# Altium PCB TermoCoupleNode.PcbDoc (part 2 of 2)
Units mm, origin at the board's own origin, x right, y up, seen from the top; angles counter-clockwise.
Board outline 65 x 65 mm, 4 copper layers (Top Layer 1, GND, 3V3, Bottom Layer 1), stack 0.408 mm thick; 64 components, 46 nets, 247 pads, 276 vias.
Unrouted connection lines stored in the file: 64.
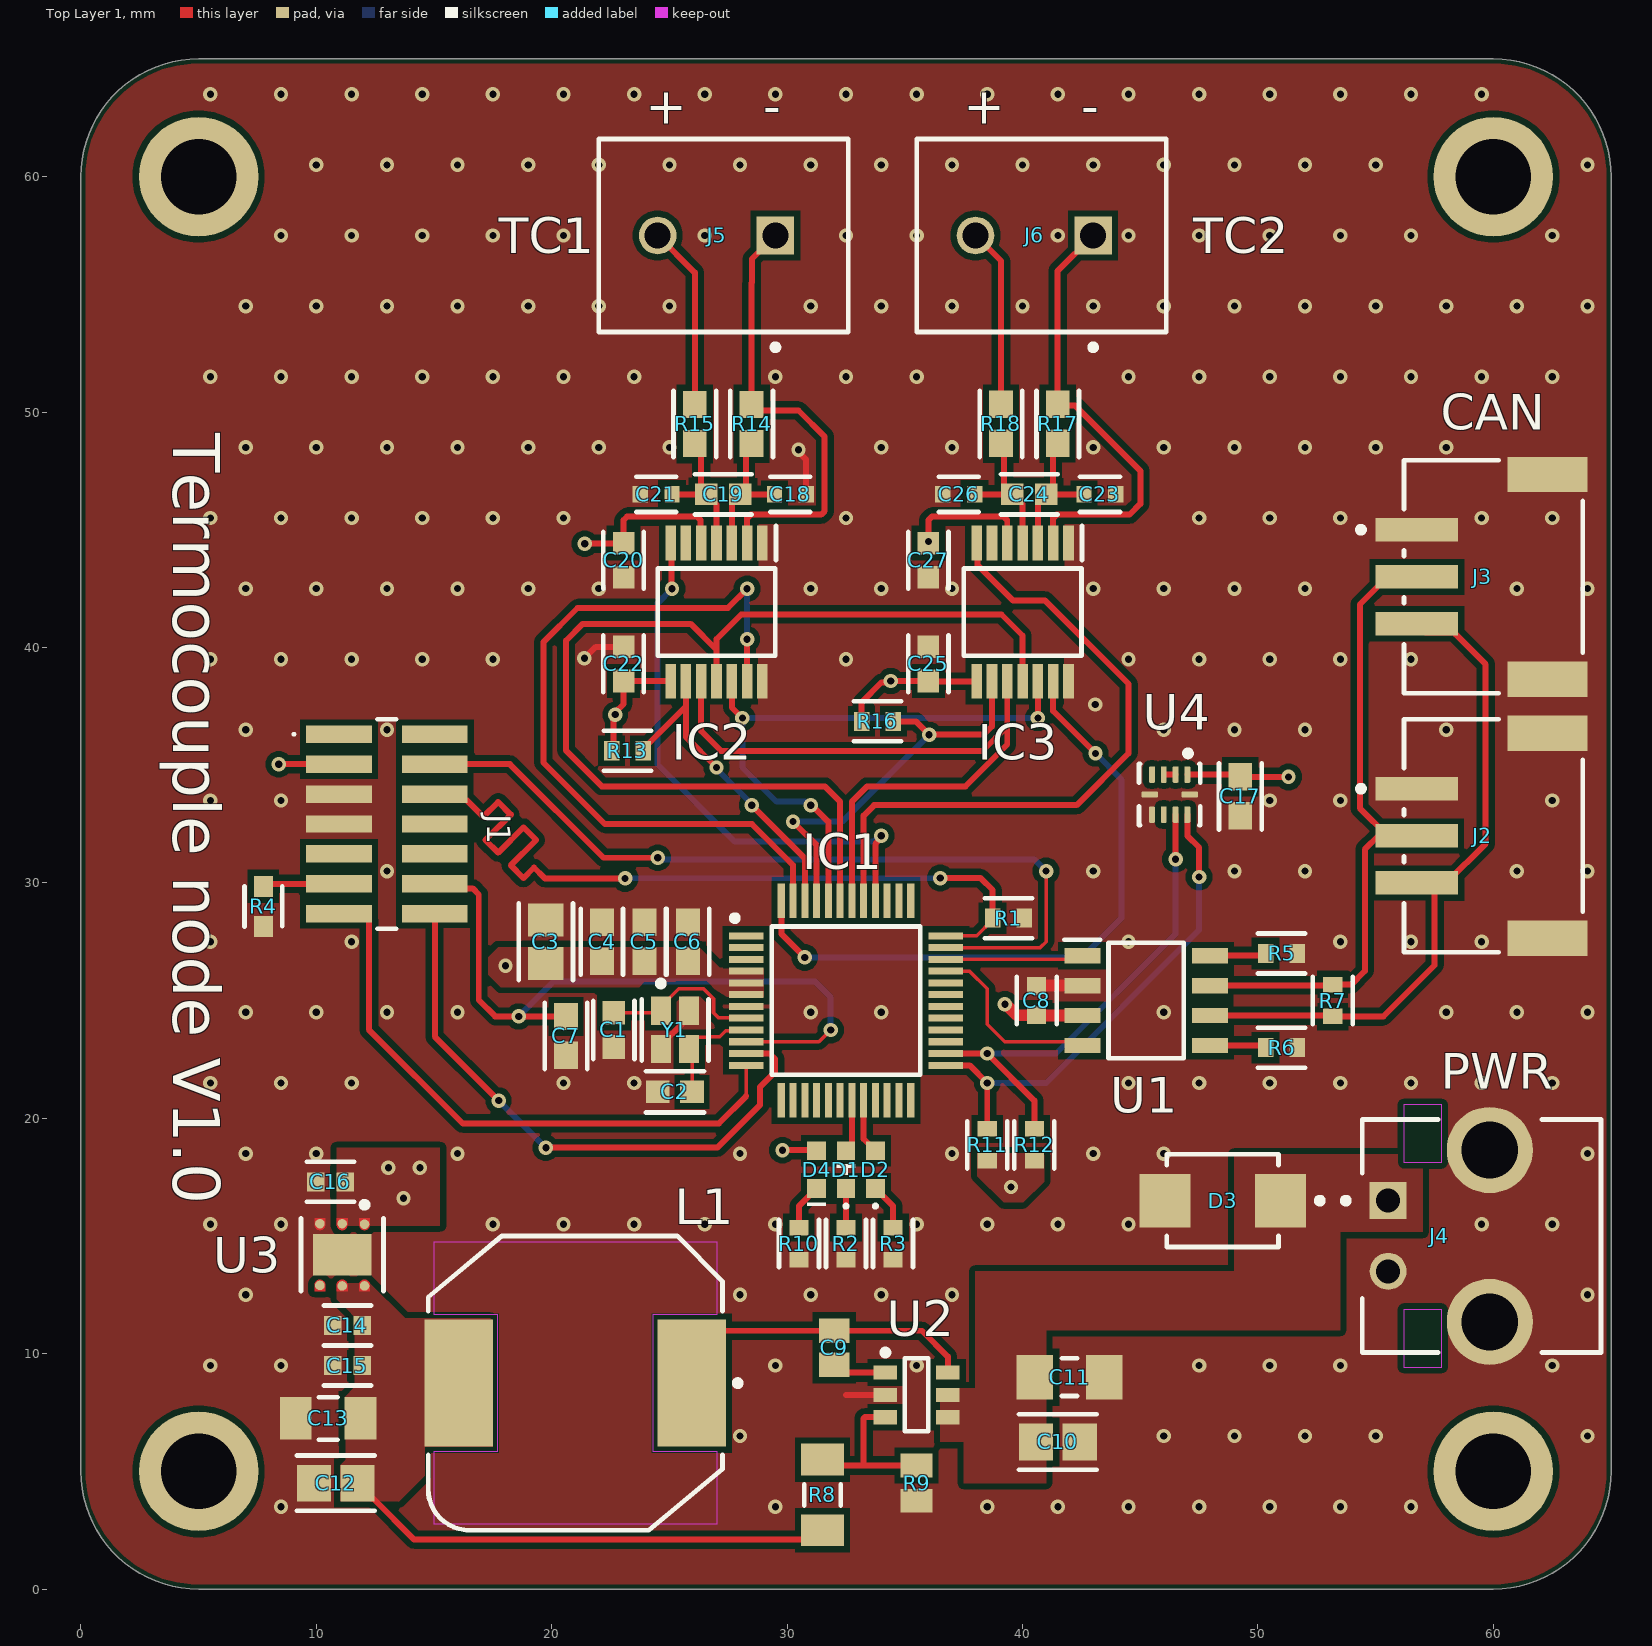
[diagram p0: Top Layer 1 view]

## Polygon pours and split planes (outlines as drawn) (continued)
3V3 on 3V3 (split plane): 60.294,64.482 60.586,64.453 60.876,64.406 61.163,64.339 61.444,64.253 61.719,64.15 61.987,64.029 62.246,63.89 62.496,63.735 62.734,63.564 62.962,63.377 63.176,63.176 63.377,62.962 63.564,62.734 63.735,62.496 63.89,62.246 64.029,61.987 64.15,61.719 64.253,61.444 64.339,61.163 64.406,60.876 64.453,60.586 64.482,60.294 64.491,60.018 64.49,60 64.49,5 64.491,4.982 64.482,4.706 64.453,4.414 64.406,4.124 64.339,3.837 64.253,3.556 64.15,3.281 64.029,3.013 63.89,2.754 63.735,2.504 63.564,2.266 63.377,2.038 63.176,1.824 62.962,1.623 62.734,1.436 62.496,1.265 62.246,1.11 61.987,0.971 61.719,0.85 61.444,0.747 61.163,0.661 60.876,0.594 60.586,0.547 60.294,0.518 60.018,0.509 60,0.51 5,0.51 4.982,0.509 4.706,0.518 4.414,0.547 4.124,0.594 3.837,0.661 3.556,0.747 3.281,0.85 3.013,0.971 2.754,1.11 2.504,1.265 2.266,1.436 2.038,1.623 1.824,1.824 1.623,2.038 1.436,2.266 1.265,2.504 1.11,2.754 0.971,3.013 0.85,3.281 0.747,3.556 0.661,3.837 0.594,4.124 0.547,4.414 0.518,4.706 0.509,4.982 0.51,5 0.51,60 0.509,60.018 0.518,60.294 0.547,60.586 0.594,60.876 0.661,61.163 0.747,61.444 0.85,61.719 0.971,61.987 1.11,62.246 1.265,62.496 1.436,62.734 1.623,62.962 1.824,63.176 2.038,63.377 2.266,63.564 2.504,63.735 2.754,63.89 3.013,64.029 3.281,64.15 3.556,64.253 3.837,64.339 4.124,64.406 4.414,64.453 4.706,64.482 4.982,64.491 5,64.49 60,64.49 60.018,64.491
GND on GND (split plane): 60.294,64.482 60.586,64.453 60.876,64.406 61.163,64.339 61.444,64.253 61.719,64.15 61.987,64.029 62.246,63.89 62.496,63.735 62.734,63.564 62.962,63.377 63.176,63.176 63.377,62.962 63.564,62.734 63.735,62.496 63.89,62.246 64.029,61.987 64.15,61.719 64.253,61.444 64.339,61.163 64.406,60.876 64.453,60.586 64.482,60.294 64.491,60.018 64.49,60 64.49,5 64.491,4.982 64.482,4.706 64.453,4.414 64.406,4.124 64.339,3.837 64.253,3.556 64.15,3.281 64.029,3.013 63.89,2.754 63.735,2.504 63.564,2.266 63.377,2.038 63.176,1.824 62.962,1.623 62.734,1.436 62.496,1.265 62.246,1.11 61.987,0.971 61.719,0.85 61.444,0.747 61.163,0.661 60.876,0.594 60.586,0.547 60.294,0.518 60.018,0.509 60,0.51 5,0.51 4.982,0.509 4.706,0.518 4.414,0.547 4.124,0.594 3.837,0.661 3.556,0.747 3.281,0.85 3.013,0.971 2.754,1.11 2.504,1.265 2.266,1.436 2.038,1.623 1.824,1.824 1.623,2.038 1.436,2.266 1.265,2.504 1.11,2.754 0.971,3.013 0.85,3.281 0.747,3.556 0.661,3.837 0.594,4.124 0.547,4.414 0.518,4.706 0.509,4.982 0.51,5 0.51,60 0.509,60.018 0.518,60.294 0.547,60.586 0.594,60.876 0.661,61.163 0.747,61.444 0.85,61.719 0.971,61.987 1.11,62.246 1.265,62.496 1.436,62.734 1.623,62.962 1.824,63.176 2.038,63.377 2.266,63.564 2.504,63.735 2.754,63.89 3.013,64.029 3.281,64.15 3.556,64.253 3.837,64.339 4.124,64.406 4.414,64.453 4.706,64.482 4.982,64.491 5,64.49 60,64.49 60.018,64.491

## Silkscreen, mask and mechanical layers (free items; w line width, h text height)
Top Overlay:
  text "+" at 23.992,62.238 h1.52
  text "-" at 28.992,62.238 h1.52
  text "+" at 37.492,62.238 h1.52
  text "-" at 42.492,62.238 h1.52
  text "TC1" at 17.754,56.754 h1.52
  text "TC2" at 47.254,56.754 h1.52
  text "CAN" at 57.754,49.254 h1.52
  text "Termocouple node V1.0" at 3.921,49.104 h2 r270
  text "PWR" at 57.754,21.254 h1.52
Bottom 3D Body:
  lines w0.254: 0,0 65,0 65,65 0,65 0,0